# Altium PCB PCB1.PcbDoc
Units mm, origin at the board's own origin, x right, y up, seen from the top; angles counter-clockwise.
Board outline 32.21 x 40 mm, 4 copper layers (Top Layer, Mid-Layer 1, Mid-Layer 2, Bottom Layer); 94 components, 53 nets, 416 pads, 127 vias.
Unrouted connection lines stored in the file: 127.
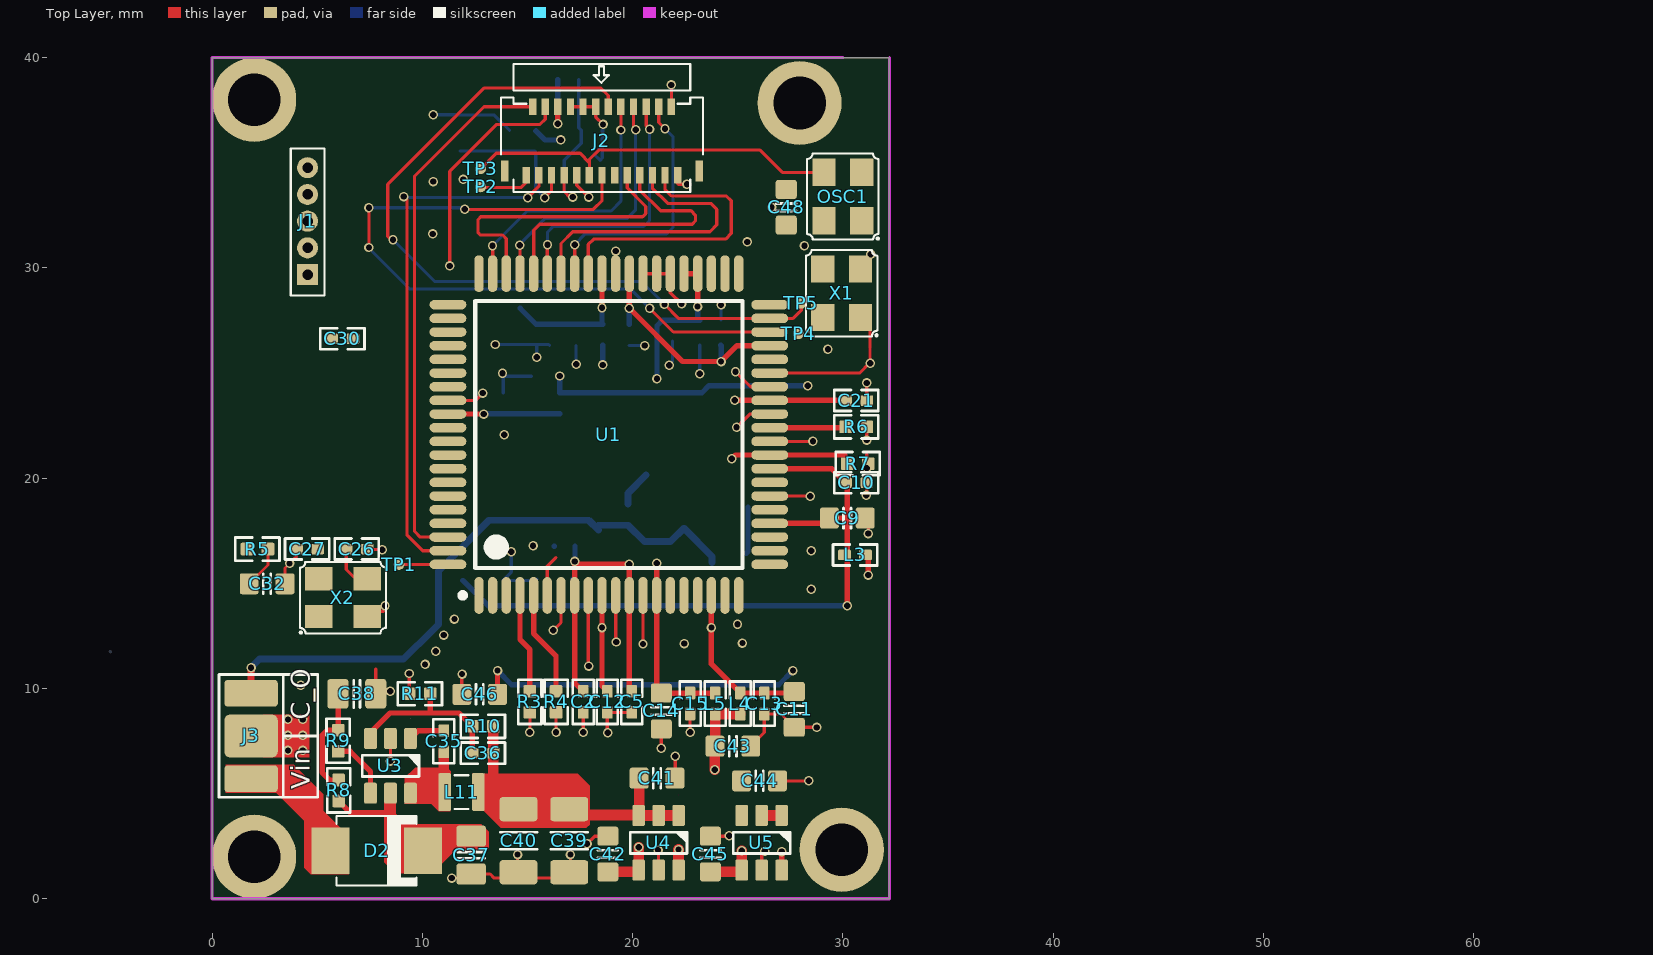
[diagram p0: Top Layer view]
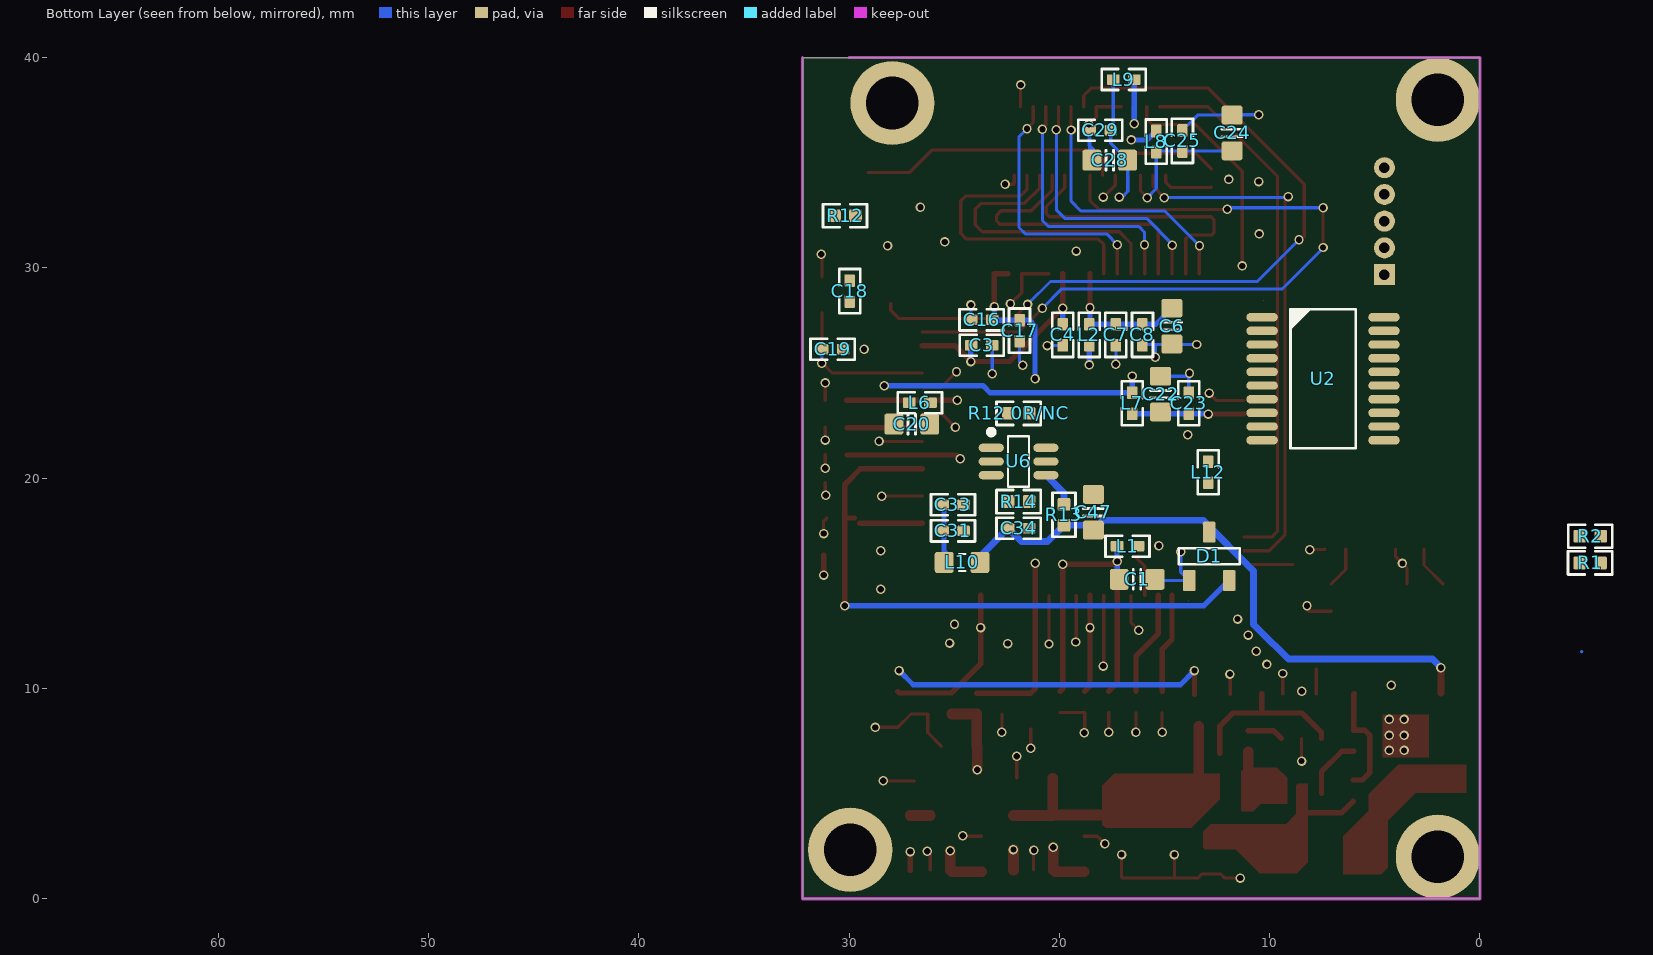
[diagram p1: Bottom Layer view, seen from below]
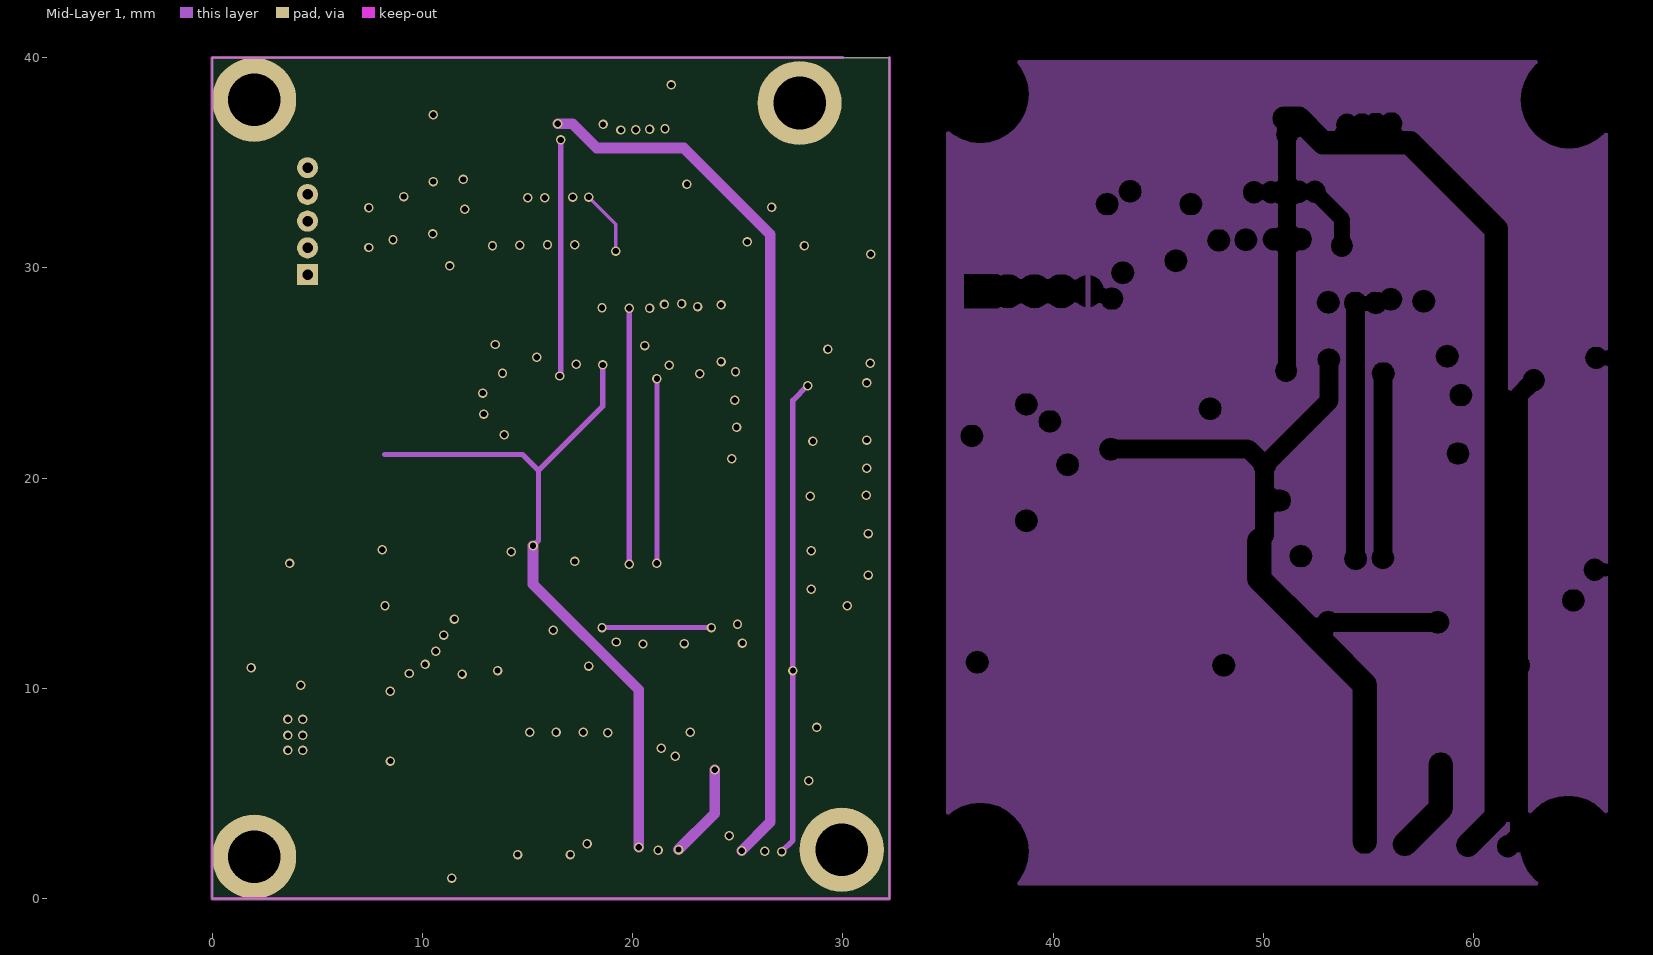
[diagram p2: Mid-Layer 1]
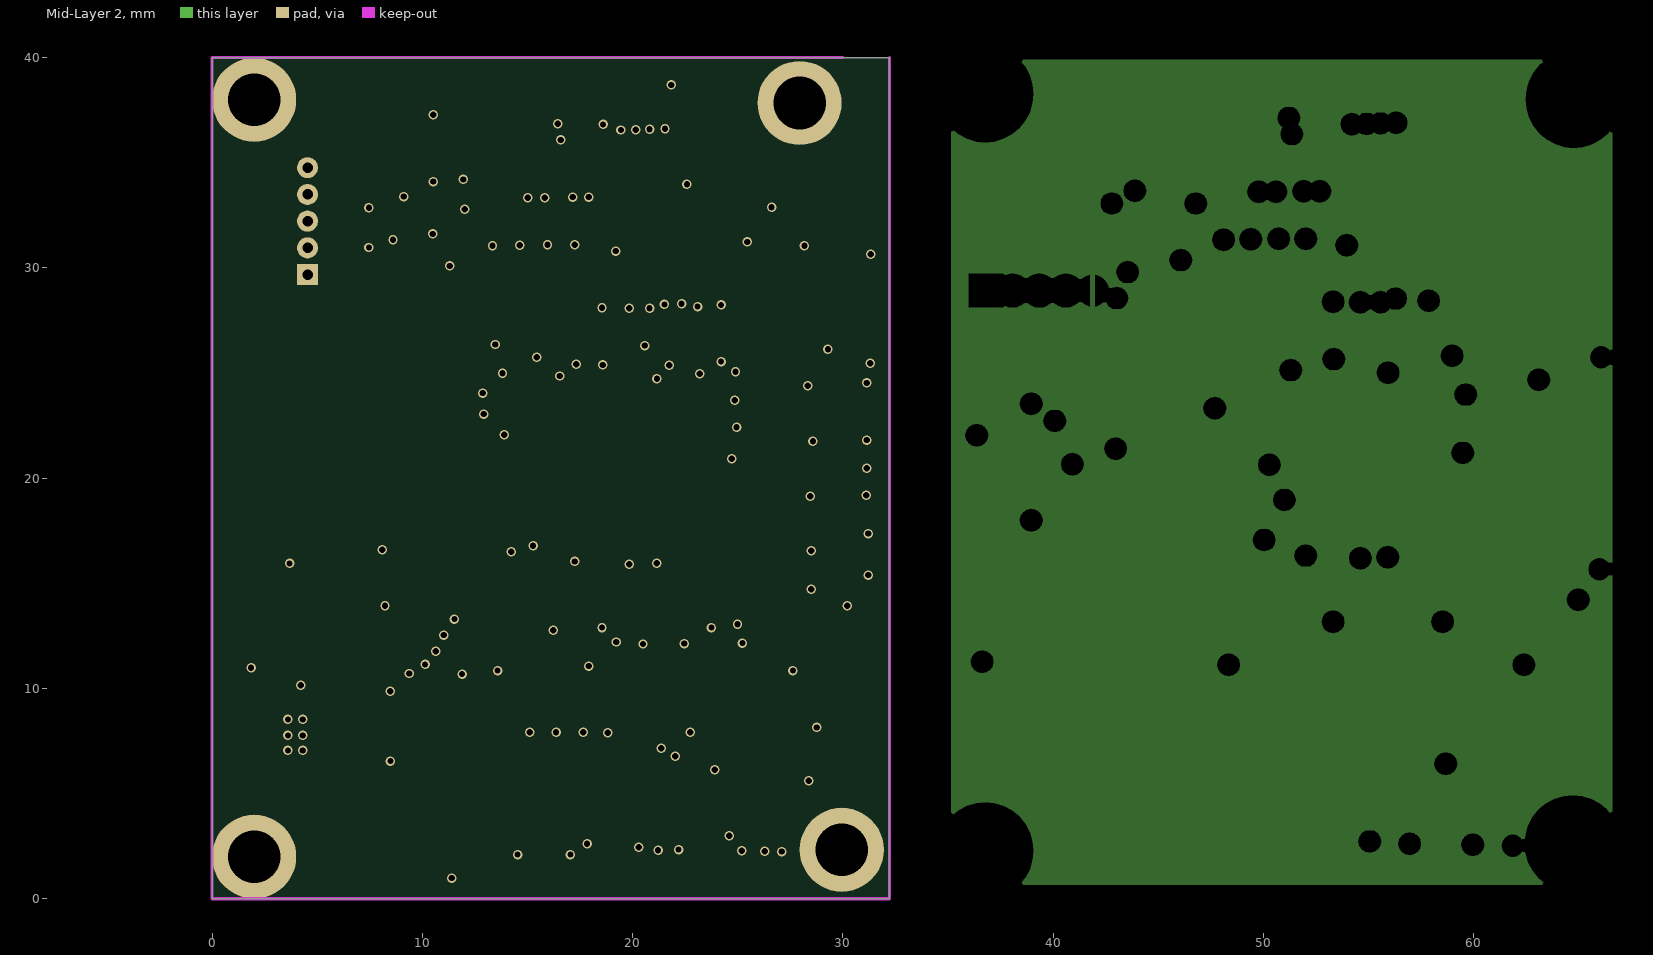
[diagram p3: Mid-Layer 2]
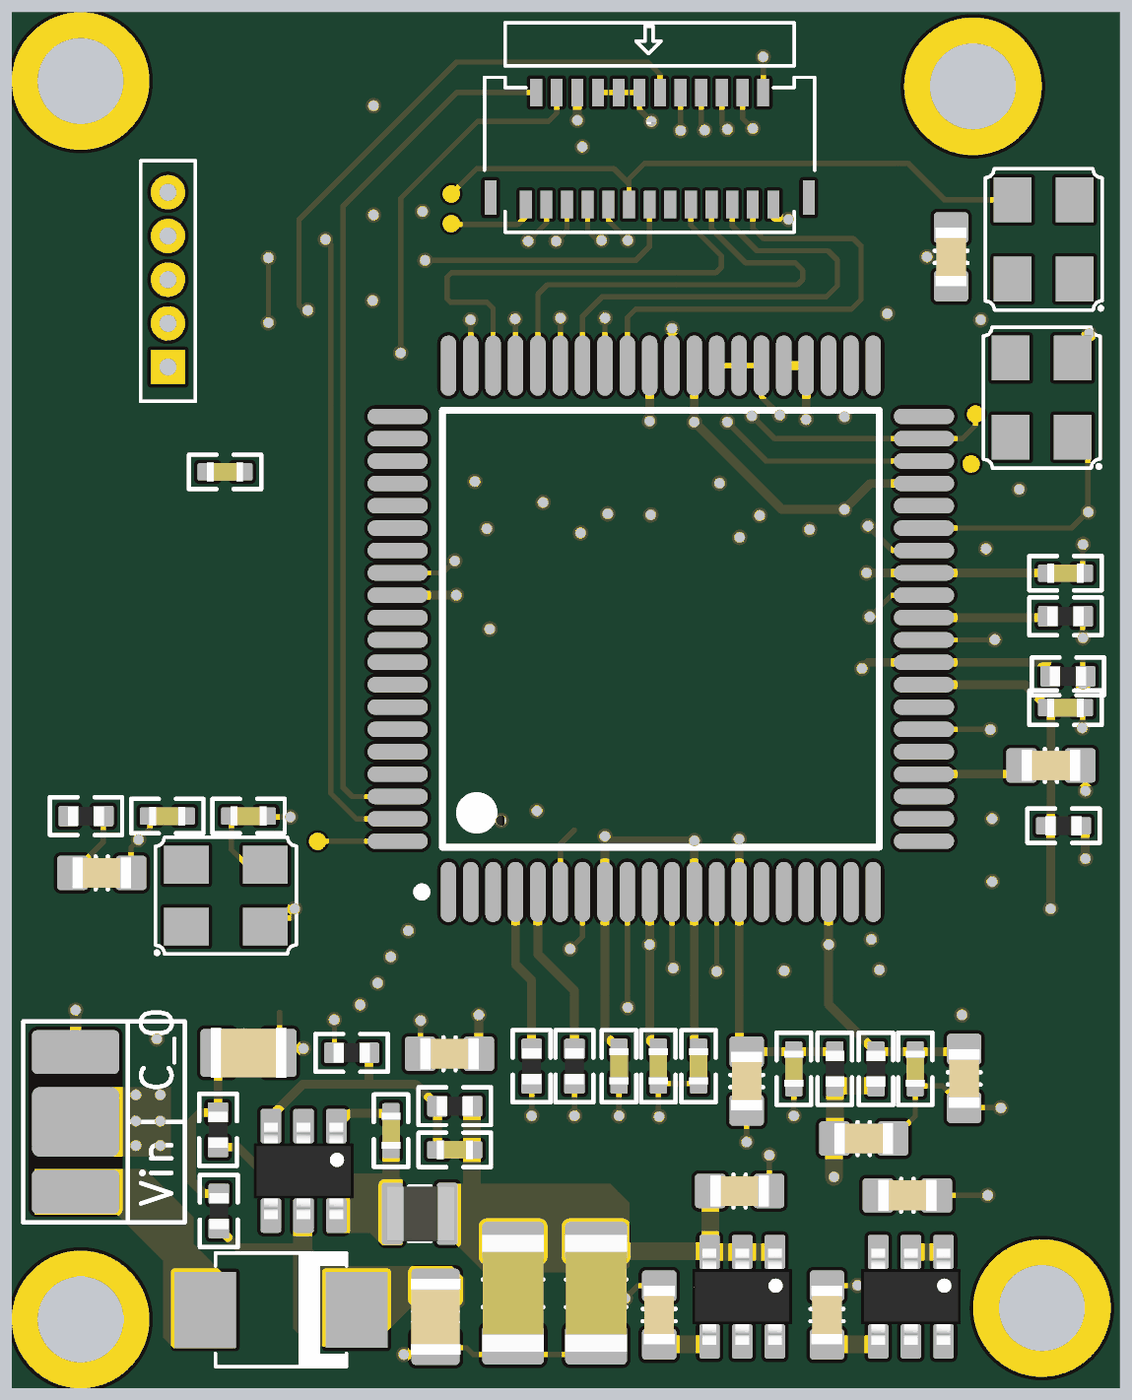
[diagram p4: 3D render of the assembled board from above, using the file's embedded part models]
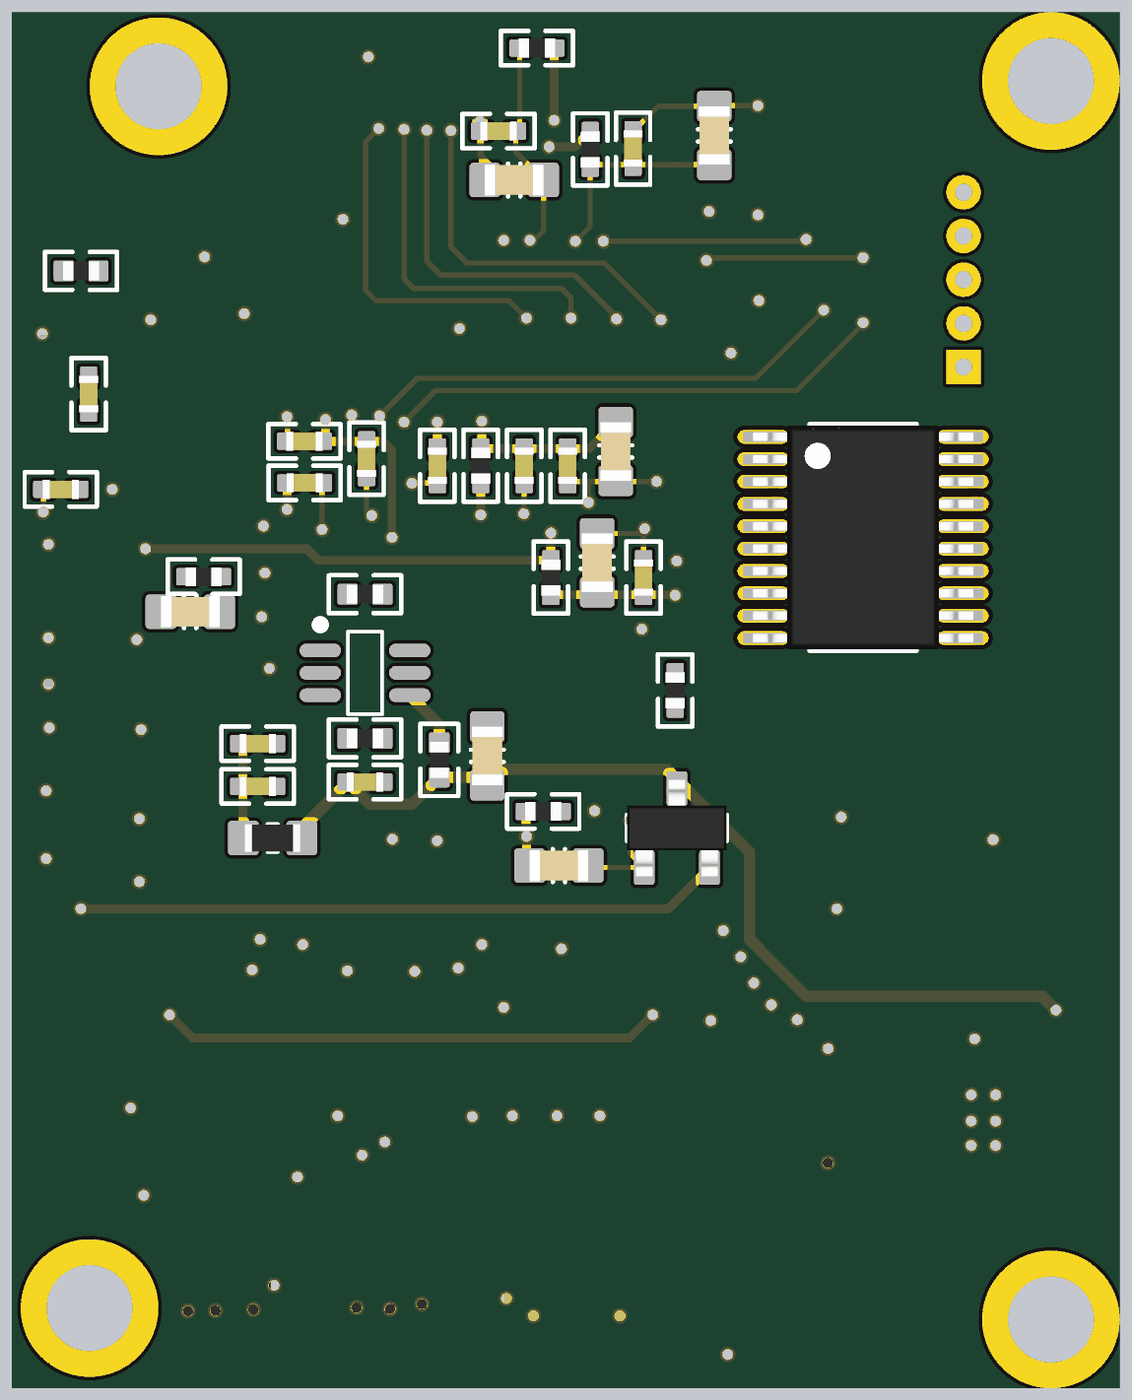
[diagram p5: 3D render of the assembled board from below, using the file's embedded part models]

## Layer stack, top to bottom
Top Solder: solder mask 0.0102, Solder Resist, Dk 3.5
Top Layer: signal copper 0.0356
Dielectric 1: dielectric 0.32, FR-4, Dk 4.8
Mid-Layer 1: signal copper 0.0356
Dielectric3: dielectric 0.32, FR-4, Dk 4.8
Mid-Layer 2: signal copper 0.0356
Dielectric2: dielectric 0.32, FR-4, Dk 4.8
Bottom Layer: signal copper 0.0356
Bottom Solder: solder mask 0.0102, Solder Resist, Dk 3.5

## Board outline
0,0 32.207,0 32.207,40 0,40

## Design rules (kind name [scope] priority, off if disabled: settings)
Clearance Clearance_Keepout [IsKeepOut] p1: gap=0.3
Clearance Clearance_Polygon [InPolygon] p2: gap=0.305
Clearance [All] p3: gap=0.152
HoleSize [All] p1: absolutevalues=TRUE maxlimit=3 minlimit=0.3 maxpercent=80.000 minpercent=20.000
PolygonConnect Vias [IsVia] p1: connectstyle=Direct reliefconductorwidth=0.254 reliefentries=4 polygonreliefangle="90 Angle" airgapwidth=0.254
PolygonConnect [All] p2: connectstyle=Relief reliefconductorwidth=0.254 reliefentries=4 polygonreliefangle="90 Angle" airgapwidth=0.254
RoutingVias [All] p1: holewidth=0.3 width=0.45 viastyle="Through Hole" minholewidth=0.3 minwidth=0.45 maxholewidth=1 maxwidth=3
SilkToSolderMaskClearance [IsPad] p1: minsilkscreentomaskgap=0.05 clearancetoexposedcopper=TRUE
SolderMaskExpansion [All] p1: expansion=0.102
Width [All] p1: maxlimit=2.54 minlimit=0.152 preferedwidth=0.152
28 further rules are at their usual default settings.

## Classes and differential pairs
net class Undefined: D0 D1 D2 D3 D4 D5 D6 D7
component class POWER: C35 C36 C37 C38 C39 C40 C41 C42 C43 C44 C45 C46 C48 D2 J3 L11 OSC1 R8 R9 R10 R11 U3 U4 U5
component class MAIN: C1 C2 C3 C4 C5 C6 C7 C8 C9 C10 C11 C12 C13 C14 C15 C16 C17 C18 C19 C20 C21 C22 C23 C24 C25 C26 C27 C28 C29 C30 C31 C32 C33 C34 C47 D1 J1 J2 L1 L2 L3 L4 L5 L6 L7 L8 L9 L10 L12 R1 R2 R3 R4 R5 R6 R7 R12 "R12 0R/NC" R13 R14 TP1 TP2 TP3 TP4 TP5 U1 U2 U6 X1 X2

## Components (designator, comment, footprint, x,y, rotation, side; value= is the part's Value field where it differs from the comment)
C1 "10uF" CAPC1608X90N 16.302,15.194 r180 bottom
C2 "0.1uF" CAPC1005X55N 17.653,9.362 r270 top
C3 "0.1uF" CAPC1005X55N 23.694,26.319 r180 bottom
C4 "0.1uF" CAPC1005X55N 19.837,26.817 r270 bottom
C5 "0.1uF" CAPC1005X55N 19.964,9.362 r270 top
C6 "10uF" CAPC1608X90N 14.651,27.234 r270 bottom
C7 "0.1uF" CAPC1005X55N 17.311,26.817 r270 bottom
C8 "0.1uF" CAPC1005X55N 16.048,26.817 r270 bottom
C9 "10uF" CAPC1608X90N 30.209,18.105 r0 top
C10 "0.1uF" CAPC1005X55N 30.632,19.782 r0 top
C11 "10uF" CAPC1608X90N 27.686,9.007 r270 top
C12 "0.1uF" CAPC1005X55N 18.796,9.362 r270 top
C13 "0.1uF" CAPC1005X55N 26.264,9.286 r270 top
C14 "10uF" CAPC1608X90N 21.361,8.931 r270 top
C15 "0.1uF" CAPC1005X55N 22.733,9.286 r270 top
C16 "0.1uF" CAPC1005X55N 23.698,27.529 r0 bottom
C17 "0.1uF" CAPC1005X55N 21.895,27.021 r270 bottom
C18 "18pF" CAPC1005X55N 29.972,28.9 r270 bottom
C19 "18pF" CAPC1005X55N 30.785,26.132 r180 bottom
C20 "10uF" CAPC1608X90N 27.019,22.574 r0 bottom
C21 "0.1uF" CAPC1005X55N 30.632,23.693 r0 top
C22 "10uF" CAPC1608X90N 15.189,23.998 r90 bottom
C23 "0.1uF" CAPC1005X55N 13.843,23.566 r90 bottom
C24 "10uF" CAPC1608X90N 11.786,36.419 r90 bottom
C25 "0.1uF" CAPC1005X55N 14.148,36.038 r90 bottom
C26 "18pF" CAPC1005X55N 6.883,16.632 r0 top
C27 "18pF" CAPC1005X55N 4.521,16.632 r180 top
C28 "10uF" CAPC1608X90N 17.602,35.123 r0 bottom
C29 "0.1uF" CAPC1005X55N 18.059,36.546 r0 bottom
C30 "0.1uF" CAPC1005X55N 6.199,26.638 r0 top
C31 "33pF" CAPC1005X55N 25.058,17.494 r180 bottom
C32 "10uF" CAPC1608X90N 2.616,14.981 r0 top
C33 "0.1uF" CAPC1005X55N 25.058,18.739 r180 bottom
C34 "270PF" CAPC1005X55N 21.939,17.621 r180 bottom
C35 "0.1uF" CAPC1005X55N 11.024,7.488 r270 top
C36 "10nF" CAPC1005X55N 12.878,6.929 r180 top
C37 "10uF/16V(2012)" CAPC2012X135N 12.319,2.078 r270 top
C38 "10uF/16V(2012)" CAPC2012X135N 6.883,9.749 r0 top
C39 "22uF/6.3V(3216)" CAPC3216X100N 16.986,2.762 r270 top
C40 "22uF/6.3V(3216)" CAPC3216X100N 14.573,2.762 r270 top
C41 "1uF/6.3V" CAPC1608X90N 21.158,5.735 r0 top
C42 "1uF/6.3V" CAPC1608X90N 18.821,2.129 r90 top
C43 "1uF/6.3V" CAPC1608X90N 24.765,7.259 r0 top
C44 "1uF/6.3V" CAPC1608X90N 26.035,5.608 r0 top
C45 "1uF/6.3V" CAPC1608X90N 23.698,2.129 r90 top
C46 "1uF/6.3V" CAPC1608X90N 12.725,9.723 r180 top
C47 "10uF" CAPC1608X90N 18.383,18.383 r90 bottom
C48 "1uF/6.3V" CAPC1608X90N 27.305,32.888 r90 top
D1 "BAT54SLT1" SOT23-3 12.873,16.286 r90 bottom
D2 "RB050LA-40" RB50LA-40 7.823,2.281 r270 top
J1 "1.27mm" "JP 1.27mm" 4.54,32.226 r90 top
J2 "00  6296 025 230 883" "FPC ASSY 0.3MM" 18.542,36.038 r0 top
J3 "pad_3point" Jump_3Way_Text1 1.854,7.742 r90 top
L1 "FB" INDC1005N 16.759,16.769 r0 bottom
L2 "FB" INDC1005N 18.574,26.817 r90 bottom
L3 "FB" INDC1005N 30.575,16.351 r180 top
L4 "FB" INDC1005N 25.121,9.286 r90 top
L5 "FB" INDC1005N 23.927,9.286 r90 top
L6 "FB" INDC1005N 26.63,23.59 r180 bottom
L7 "FB" INDC1005N 16.535,23.566 r270 bottom
L8 "FB" INDC1005N 15.392,36.012 r270 bottom
L9 "FB" INDC1005N 16.942,38.959 r0 bottom
L10 "FB" INDC1608N 24.626,15.995 r180 bottom
L11 "NRS2012T 4R7M GJ" INDC2016X180N 11.862,5.075 r0 top
L12 "FB" INDC1005N 12.922,20.288 r90 bottom
OSC1 "27Mhz" XTAL-4pin-3225 29.997,33.396 r90 top
R1 "4.7K" RESC1005X40N -5.239,15.97 r0 bottom
R2 "4.7K" RESC1005X40N -5.247,17.24 r0 bottom
R3 "10K" RESC1005X40N 15.113,9.362 r90 top
R4 "10K" RESC1005X40N 16.358,9.362 r90 top
R5 "10K" RESC1005X40N 2.159,16.632 r180 top
R6 "1.2K,1%" RESC1005X40N 30.632,22.439 r0 top
R7 "75" RESC1005X40N 30.702,20.694 r0 top
R8 "10K" RESC1005X40N 6.02,5.151 r90 top
R9 "100K" RESC1005X40N 5.994,7.513 r270 top
R10 "30.9K,1%" RESC1005X40N 12.878,8.199 r180 top
R11 "5.76K,1%" RESC1005X40N 9.881,9.749 r180 top
R12 "0R" RESC1005X40N 30.194,32.48 r0 bottom
"R12 0R/NC" "0R" RESC1005X40N 21.939,23.082 r0 bottom
R13 "75R2" RESC1005X40N 19.78,18.264 r90 bottom
R14 "0R" RESC1005X40N 21.939,18.891 r180 bottom
TP1 "TEST POINT" TP-R20 8.89,15.895 r270 top
TP2 "TEST POINT" TP-R20 12.776,33.853 r270 top
TP3 "TEST POINT" TP-R20 12.776,34.717 r270 top
TP4 "TEST POINT" TP-R20 27.889,26.868 r90 top
TP5 "TEST POINT" TP-R20 28.016,28.316 r90 top
U1 "CH7025/CH7026_LQFP80" TQFP80_N 18.868,22.077 r90 top
U2 "MINI51FDE" TSSOP65P640X120-20N 7.461,24.733 r180 bottom
U3 "FR9801" SOT23-6 8.484,6.32 r270 top
U4 "FP6121-IS9GTR/TSOT23-6L" SOT23-6 21.234,2.662 r270 top
U5 "FP6121-IS9GTR/TSOT23-6L" SOT23-6 26.137,2.662 r270 top
U6 "OPA361/SC70" SC07 21.939,20.796 r180 bottom
X1 "Crystal (14.318 MHz)" XTAL-4pin-3225 29.94,28.797 r90 top
X2 "Crystal (12MHz)" XTAL-4pin-3225 6.223,14.321 r0 top

## Footprints (in the part's own frame and the unit in brackets; to place one, negate y for a bottom-side part, rotate by r counter-clockwise, add the part's x,y. Pads: shape width x height; smd on the part's side, far side on the other; paste and mask are expansions set on the pad)
CAPC1005X55N [mm] "Chip Capacitor, Body 1.0x0.5mm, EIA 0402, IPC Medium Density"
  round 0.2 on Mech15: 0(0,0)
  rrect20% 0.6x0.5 smd: 1(-0.5,0) 2(0.5,0)
  Top Layer pour cut-out: -0.325,0.375 -0.2,0.5 0.2,0.5 0.325,0.375 0.325,-0.375 0.2,-0.5 -0.2,-0.5 -0.325,-0.375
  silkscreen extent -1.05,-0.5 1.05,0.5, body extent -0.52,-0.27 0.53,0.28, height 0.55
CAPC1608X90N [mm] "Chip Capacitor, Body 1.6x0.8mm, EIA 0603, IPC Medium Density"
  round 0.254 on Mech15: 0(0,0)
  rrect25% 0.9x1 smd: 1(-0.85,0) 2(0.85,0)
  Top Layer pour cut-out: -0.6,0.5 -0.4,0.7 0.4,0.7 0.6,0.5 0.6,-0.5 0.4,-0.7 -0.4,-0.7 -0.6,-0.5
  silkscreen extent -0.18,-0.48 0.18,0.48, body extent -0.85,-0.45 0.85,0.45, height 0.89
CAPC2012X135N [mm] "Chip Capacitor, Body 2.0x1.2mm, EIA 0805, IPC Medium Density"
  round 0.254 on Mech15: 0(0,0)
  rrect25% 1x1.4 smd: 1(-0.9,0) 2(0.9,0)
  Top Layer pour cut-out: -0.675,0.7 -0.475,0.9 0.475,0.9 0.675,0.7 0.675,-0.7 0.475,-0.9 -0.475,-0.9 -0.675,-0.7
  silkscreen extent -0.15,-0.65 0.15,0.65, body extent -1.1,-0.72 1.1,0.73, height 1.34
CAPC3216X100N [mm] "Chip Capacitor, Body 3.2x1.6mm, 1.0mm H, EIA 1206, IPC Medium Density"
  round 0.508 on Mech15: 0(0,0)
  rrect25% 1.15x1.8 smd: 1(-1.5,0) 2(1.5,0)
  silkscreen extent -0.4,-0.88 0.4,0.88, body extent -1.7,-0.9 1.7,0.9, height 1
"FPC ASSY 0.3MM" [mm]
  rect 0.35x0.8 smd: 1(-3.6,-1.63) 2(-3.3,1.63) 3(-3,-1.63) 4(-2.7,1.63) 5(-2.4,-1.63) 6(-2.1,1.63) 7(-1.8,-1.63) 8(-1.5,1.63) 9(-1.2,-1.63) 10(-0.9,1.63) 11(-0.6,-1.63) 12(-0.3,1.63) 13(0,-1.63) 14(0.3,1.63) 15(0.6,-1.63) 16(0.9,1.63) 17(1.2,-1.63) 18(1.5,1.63) 19(1.8,-1.63) 20(2.1,1.63) 21(2.4,-1.63) 22(2.7,1.63) 23(3,-1.63) 24(3.3,1.63) 25(3.6,-1.63)
  rect 0.35x1 smd: ""(-4.625,-1.43) ""(4.625,-1.43)
  silkscreen extent -4.8,-2.43 4.8,3.66
INDC1005N [mm] "Chip Inductor, Body 1.0x0.5mm, EIA 0402, IPC Medium Density"
  round 0.2 on Mech15: 0(0,0)
  rrect20% 0.6x0.5 smd: 1(-0.5,0) 2(0.5,0)
  Top Layer pour cut-out: -0.325,0.375 -0.2,0.5 0.2,0.5 0.325,0.375 0.325,-0.375 0.2,-0.5 -0.2,-0.5 -0.325,-0.375
  silkscreen extent -1.05,-0.5 1.05,0.5, body extent -0.52,-0.27 0.53,0.28, height 0.4
INDC1608N [mm] "Chip bead, Body 1.6x0.8mm, 0603, IPC Medium Density"
  round 0.254 on Mech15: 0(0,0)
  rrect25% 0.9x1 smd: 1(-0.85,0) 2(0.85,0)
  Top Layer pour cut-out: -0.4,0.6 0.4,0.6 0.4,-0.6 -0.4,-0.6
  silkscreen extent -0.15,-0.41 0.15,0.41, body extent -0.8,-0.4 0.8,0.4, height 0.79
INDC2016X180N [mm] "Chip Inductor, 2-Leads, Body 2.0x1.6mm, IPC 0806 Medium Density"
  round 0.254 on Mech15: 0(0,0)
  rrect25% 0.6x1.8 smd: 1(-0.8,0) 2(0.8,0)
  Top Layer pour cut-out: -0.5,0.875 0.5,0.875 0.5,-0.875 -0.5,-0.875
  silkscreen extent -0.33,-0.8 0.33,0.8, body extent -0.97,-0.8 1.03,0.8, height 0.99
"JP 1.27mm" [mm]
  rect 1x1 hole 0.5: 1(-2.54,0)
  round 1 hole 0.5: 2(-1.27,0) 3(0,0) 4(1.27,0) 5(2.54,0)
  silkscreen extent -3.54,-0.8 3.46,0.8
Jump_3Way_Text1 [mil] "SMT jumper for fixed or variable"
  rrect25% 50x100 smd: 1(-80,0) 3(80,0)
  rrect25% 80x100 smd: 2(0,0)
  rrect25% 218x108 on Top Solder: SM(0,0)
  silkscreen extent -115,-125 115,60
RB50LA-40 [mm]
  rect 2.2x1.8 smd: 1(0,-2.2) 2(0,2.2)
  silkscreen extent -1.65,-1.91 1.65,1.91
RESC1005X40N [mm] "Chip Resistor, Body 1.0x0.5mm, EIA 0402, IPC Medium Density"
  round 0.2 on Mech15: 0(0,0)
  rrect20% 0.6x0.6 smd: 1(-0.5,0) 2(0.5,0)
  Top Layer pour cut-out: -0.325,0.375 -0.2,0.5 0.2,0.5 0.325,0.375 0.325,-0.375 0.2,-0.5 -0.2,-0.5 -0.325,-0.375
  silkscreen extent -1.05,-0.55 1.05,0.55, body extent -0.52,-0.27 0.53,0.28, height 0.4
SC07 [mm]
  oval 1.2x0.4 smd: 1(-1.3,0.65) 2(-1.3,0) 3(-1.3,-0.65) 4(1.3,-0.65) 5(1.3,0) 6(1.3,0.65)
  silkscreen extent -1.42,-1.2 0.5,1.52
SOT23-3 [mm] "SOT23, 3 pin"
  round 0.5 on Mech15: 0(0,0)
  rrect25% 1x0.6 smd: 1(-1.15,0.95) 2(-1.15,-0.95) 3(1.15,0)
  silkscreen extent -0.38,-1.45 0.38,1.45, body extent -1.4,-1.45 1.4,1.45, height 1.29
SOT23-6 [mm]
  round 0.5 on Mech15: 0(0,0)
  rrect25% 1x0.6 smd: 1(-1.3,0.95) 2(-1.3,0) 3(-1.3,-0.95) 4(1.3,-0.95) 5(1.3,0) 6(1.3,0.95)
  silkscreen extent -0.51,-1.35 0.51,1.35, body extent -1.4,-1.45 1.4,1.45, height 1.44
TP-R20 [mil]
  round 20 smd paste-30 mask+3: 1(0,0)
  body extent -11,-11 11,11
TQFP80_N [mm] "80-Pin Thin Plastic Quad Flat Pack 0.65 mm Pitch, IPC Medium Density"
  oval 1.75x0.45 smd: 1(-7.65,6.175) 2(-7.65,5.525) 3(-7.65,4.875) 4(-7.65,4.225) 5(-7.65,3.575) 6(-7.65,2.925) 7(-7.65,2.275) 8(-7.65,1.625) 9(-7.65,0.975) 10(-7.65,0.325) 11(-7.65,-0.325) 12(-7.65,-0.975) 13(-7.65,-1.625) 14(-7.65,-2.275) 15(-7.65,-2.925) 16(-7.65,-3.575) 17(-7.65,-4.225) 18(-7.65,-4.875) 19(-7.65,-5.525) 20(-7.65,-6.175) 41(7.65,-6.175) 42(7.65,-5.525) 43(7.65,-4.875) 44(7.65,-4.225) 45(7.65,-3.575) 46(7.65,-2.925) 47(7.65,-2.275) 48(7.65,-1.625) 49(7.65,-0.975) 50(7.65,-0.325) 51(7.65,0.325) 52(7.65,0.975) 53(7.65,1.625) 54(7.65,2.275) 55(7.65,2.925) 56(7.65,3.575) 57(7.65,4.225) 58(7.65,4.875) 59(7.65,5.525) 60(7.65,6.175)
  oval 0.45x1.75 smd: 21(-6.175,-7.65) 22(-5.525,-7.65) 23(-4.875,-7.65) 24(-4.225,-7.65) 25(-3.575,-7.65) 26(-2.925,-7.65) 27(-2.275,-7.65) 28(-1.625,-7.65) 29(-0.975,-7.65) 30(-0.325,-7.65) 31(0.325,-7.65) 32(0.975,-7.65) 33(1.625,-7.65) 34(2.275,-7.65) 35(2.925,-7.65) 36(3.575,-7.65) 37(4.225,-7.65) 38(4.875,-7.65) 39(5.525,-7.65) 40(6.175,-7.65) 61(6.175,7.65) 62(5.525,7.65) 63(4.875,7.65) 64(4.225,7.65) 65(3.575,7.65) 66(2.925,7.65) 67(2.275,7.65) 68(1.625,7.65) 69(0.975,7.65) 70(0.325,7.65) 71(-0.325,7.65) 72(-0.975,7.65) 73(-1.625,7.65) 74(-2.275,7.65) 75(-2.925,7.65) 76(-3.575,7.65) 77(-4.225,7.65) 78(-4.875,7.65) 79(-5.525,7.65) 80(-6.175,7.65)
  silkscreen extent -7.77,-6.35 6.35,7.07, body extent -7,-7 7,7, height 1.6
TSSOP65P640X120-20N [mm] "TSSOP, 20-Leads, Body 6.6x4.5mm (max), Pitch 0.65mm, IPC Medium Density"
  round 0.508 on Mech15 mask+0.127: 0(0,0)
  oval 1.5x0.4 smd paste-1 mask+0.127: 1(-2.9,2.925) 2(-2.9,2.275) 3(-2.9,1.625) 4(-2.9,0.975) 5(-2.9,0.325) 6(-2.9,-0.325) 7(-2.9,-0.975) 8(-2.9,-1.625) 9(-2.9,-2.275) 10(-2.9,-2.925) 11(2.9,-2.925) 12(2.9,-2.275) 13(2.9,-1.625) 14(2.9,-0.975) 15(2.9,-0.325) 16(2.9,0.325) 17(2.9,0.975) 18(2.9,1.625) 19(2.9,2.275) 20(2.9,2.925)
  silkscreen extent -1.55,-3.3 1.55,3.3, body extent -3.2,-3.25 3.2,3.25, height 1.2
XTAL-4pin-3225 [mm] "3.2 x 2.5 x 0.8 mm ceramic  crystal"
  rect 1.3x1.1 smd: 1(-1.15,-0.9) 2(1.15,-0.9) 3(1.15,0.9) 4(-1.15,0.9)
  silkscreen extent -2.05,-1.71 2.05,1.7, body extent -1.6,-1.25 1.6,1.25, height 0.8

## Part data
C1 C6 C9 C11 C14 C20 C22 C24 C28 C32 C47: library part PCAP_0, "CAP - 10uF 16V TE Tant"
C2 C3 C4 C5 C7 C8 C10 C12 C13 C15 C16 C17 C21 C23 C25 C29: library part C_0
C18 C19 C26 C27 C31 C33 C34: library part CAP
C30: library part "CAP NP_3"
C35: library part "CAP NP_16"
C36: library part "CAP NP_13"
C37: library part "CAP NP_17"
C38: library part "CAP NP_18"
C39: library part "CAP NP_15"
C40: library part "CAP NP_14"
C41 C44 C48: library part "CAP NP_0"
C42 C43 C45 C46: library part "CAP NP_1"
D1: library part "DIODE DUAL SERIES SOT23"
D2: library part "DIODE PIN_1"
J1: library part CON5_Dup1
J2: library part CON25
J3: library part CON3
L1 L2 L3 L4 L5 L6 L7 L8 L9 L10 L12: library part INDUCTOR
L11: library part INDUCTOR_0
OSC1: library part XO_50Mhz_3V3_50ppm_SMD, "OSC XO 50.000MHZ CMOS SMD"
R1 R2 R7: library part RESISTOR
R3 R4: library part R
R5 R12 "R12 0R/NC" R13 R14: library part 0R,1/10W,5%,0603_9, "0R,1/10W,5%,0603"
R6: library part R_4
R8 R9: library part 0R,1/10W,5%,0603_0, "0R,1/10W,5%,0603"
R10: library part 0R,1/10W,5%,0603_10, "0R,1/10W,5%,0603"
R11: library part 0R,1/10W,5%,0603_11, "0R,1/10W,5%,0603"
TP1 TP4 TP5: library part "Test Point_0"
TP2: library part "Test Point_1"
TP3: library part "Test Point_2"
U1: library part CH7025_LQFP80_0
U2: library part "IC TvDecoder TI TVP5150 QFP32_2"
U3: library part R1244N001B_1
U4 U5 U6: library part "IC DC/DC RT8258 SOT26_0"
X1: library part 535-9118-1-ND_0
X2: library part 535-9118-1-ND_1

## Free pads (board coordinates)
  round 4 hole 2.5: ""(2,2) ""(2,38) ""(27.94,37.846) ""(29.947,2.332)

## Via types
v1: diameter 0.45, hole 0.3, Top Layer to Bottom Layer, tented both sides, 127 vias

## Nets (pads, with @x,y where several pads share a name; then routed paths per layer and width w, separated by ;. In a path a pad name is that pad's centre, name@x,y a point inside that pad or via, vN(x,y) a via of type N, cw(c..) or ccw(c..) an arc to the next point about the centre after c; other vN are vias at no path point)
AGND: C1.2 C2.2 C3.2 C4.2 C5.2 C6.2 C7.2 C8.2 C9.2 C10.2 C11.2 C12.2 C13.2 C14.2 C15.2 C16.2 C17.2 C18.2 C19.2 C20.2 C21.2 C22.2 C23.2 C24.2 C25.2 C26.2 C27.2 C28.2 C29.2 C30.2 C32.2 C33.2 C34.2 C37.2 C38.2 C39.2 C40.2 C41.2 C42.2 C43.2 C44.2 C45.2 C46.2 C47.2 C48.2 D1.1 J1.5 J2.8 J2.10 J2.12 J2.15 J2.24 J2.25 J3.2 OSC1.2 R3.1 R4.1 R6.2 R7.2 R11.2 R14.2 U1.7 U1.9 U1.11 U1.13 U1.19 U1.26 U1.30 U1.32 U1.34 U1.46 U1.47 U1.48 U1.68 U3.2 U4.5 U5.5 U6.2 X1.2 X1.4 X2.2 X2.4 | length 85.4
  Top Layer w0.152: C32.2 3.466,15.729 v1(3.683,15.946) 4.021,16.284 C27.2 ; X2.2@7.073,13.671 8.143,13.671 ; C26.2 7.41,16.605 v1(8.096,16.605) ; C38.2 7.783,10.931 ; v1(8.484,6.548) U3.2 ; R11.2 v1@9.381,10.706 ; U1.68 12.531,23.702 v1(12.878,24.049) ; v1(11.398,0.984) 12.125,0.984 C37.2 13.219,1.178 13.413,0.984 C39.2@17.018,0.984 ; C46.2 v1@11.875,10.677 ; C40.2@14.529,1.035 v1(14.529,2.103) ; v1(15.113,7.92) R3.1 ; v1(16.231,12.771) 16.593,13.133 U1.7 ; v1(16.358,7.92) R4.1 ; J2.8 J2.10 J2.12 18.242,37.176 v1(18.593,36.825) ; C39.2@17.043,1.01 v1(17.043,2.103) ; v1(17.653,7.92) C2.2 ; v1(17.831,2.611) 18.198,2.979 C42.2 ; U1.9 17.893,11.084 v1(17.907,11.069) ; v1@18.796,7.92 C12.2 C5.2 ; v1@19.193,12.248 U1.11 ; v1(20.493,12.116) U1.13 ; U1.48 U1.47 U1.46 21.793,28.825 v1(22.327,28.291) ; v1(21.209,2.306) 21.234,2.281 U4.5 ; v1(21.361,7.158) C14.2 ; J2.24 v1(21.842,38.703) ; C41.2@22.022,5.749 v1(22.022,6.777) ; J2.25 22.142,34.012 22.174,33.98 v1(22.581,33.98) ; v1(22.733,7.92) C15.2 ; C45.2 24.574,2.979 v1(24.587,2.992) ; v1(24.892,25.065) 25.604,24.352 U1.34 ; v1(24.943,22.423) 25.572,23.052 U1.32 ; C43.2 26.264,7.908 C13.2 27.057,8.786 C11.2 v1@28.744,8.157 ; U5.5 26.137,2.103 v1(26.289,2.256) ; U1.26 28.442,19.152 v1(28.448,19.147) ; U1.30 28.565,21.752 v1(28.575,21.763) ; C44.2 v1(28.372,5.608) ; C9.2 31.21,17.954 v1(31.21,17.367) ; v1@31.132,19.215 C10.2 ; R7.2@31.132,20.475 31.132,21.135 ; R6.2 31.132,21.822 v1(31.14,21.814) ; C21.2 31.132,24.523 v1(31.14,24.531) ; X1.2@31.282,29.572 31.282,30.617 v1(31.318,30.653)
  Bottom Layer w0.152: -4.845,11.754 -4.827,11.736 ; v1(10.516,37.282) 11.772,37.282 C24.2 13.417,37.269 C25.2 ; v1(13.462,26.36) 16.005,26.36 C8.2 ; C23.2 13.843,24.963 13.958,24.848 C22.2 ; v1(14.224,16.505) 14.224,15.537 D1.1 15.394,15.136 C1.2 ; v1(15.443,25.751) 15.443,26.335 ; v1@17.311,25.432 C7.2 ; C29.2 18.559,35.813 ; v1(18.593,36.825) 18.593,35.846 18.559,35.813 ; C4.2 20.566,26.317 v1(20.574,26.309) ; v1(21.742,25.37) 21.895,25.522 C17.2 ; v1(23.19,24.963) 23.194,24.967 C3.2 ; C16.2 24.198,28.232 v1(24.206,28.24) ; 18.559,35.813 18.161,35.414 C28.2 18.559,35.23 18.559,35.813
  other v1: 3.607,7.056 4.318,7.056 3.607,7.767 4.318,7.767 18.821,7.894 28.753,8.148 3.607,8.529 4.318,8.529 8.477,9.874 4.216,10.155 11.887,10.688 9.373,10.714 10.128,11.144 10.636,11.779 22.454,12.136 25.222,12.162 19.228,12.212 11.017,12.541 24.987,13.049 11.525,13.303 8.223,13.938 28.499,14.727 28.499,16.556 31.115,19.197 31.14,20.467 13.894,22.068 13.811,24.987 17.323,25.42 29.286,26.132 28.169,31.059 25.451,31.237 10.49,31.618 26.605,32.888 10.516,34.107 11.938,34.209
AS: R4.2 U1.5 | length 5
  Top Layer w0.254: U1.5 15.293,12.617 16.358,11.552 R4.2
ATPG: R3.2 U1.4 | length 4.8
  Top Layer w0.254: U1.4 14.643,12.327 15.113,11.857 R3.2
AVDD: C1.1 C2.1 C3.1 C4.1 C5.1 L1.2 U1.8 U1.12 U1.37 U1.49 | length 40.1
  Top Layer w0.254: C2.1 17.243,10.273 U1.8 v1(17.243,16.044) 17.371,15.916 v1(19.843,15.916) U1.12 19.843,9.984 C5.1 ; U1.49 19.843,28.093 v1(19.837,28.087) 22.377,25.547 v1(24.206,25.547) 24.961,26.302 U1.37
  Mid-Layer 1 w0.254: v1(19.843,15.916) v1@19.843,28.082
  Mid-Layer 2 w0.254: v1(19.837,28.087) v1@19.843,28.082
  Bottom Layer w0.254: C1.1 17.243,15.284 v1(17.243,16.044) 17.259,16.061 L1.2 ; C4.1 v1(19.837,28.087) ; C3.1 24.206,26.307 v1(24.206,25.547)
AVDD2_8: C28.1 C29.1 J2.7 L9.2 | length 7.5
  Top Layer w0.152: J2.7 16.742,33.647 17.018,33.371 v1(17.145,33.371)
  Bottom Layer w0.152: v1(17.145,33.371) 17.018,33.371 16.752,33.636 C28.1 17.559,35.93 C29.1 17.442,36.663 L9.2
AVDD_DAC: C9.1 C10.1 D1.2 L3.2 U1.24 U1.28 | length 32
  Top Layer w0.254: U1.24 C9.1@29.504,17.852 ; U1.28 29.462,20.452 C10.1 30.209,19.705 30.209,18.105 ; C9.1@29.757,18.105 30.209,18.105 ; v1(30.201,13.94) L3.2@30.201,16.345 ; L3.2@30.209,16.353 30.209,18.105
  Bottom Layer w0.254: D1.2 13.12,13.94 v1(30.201,13.94)
AVDD_PLL: C20.1 C21.1 L6.2 U1.33 | length 5.3
  Top Layer w0.254: v1(24.85,23.702) U1.33 C21.1@30.123,23.702
CVBS_OUT: C31.2 C34.1 C47.1 D1.3 J3.3 L10.2 R13.1 | length 29.2
  Top Layer w0.33: J3.3 v1(1.854,10.993)
  Bottom Layer w0.33: v1(1.854,10.993) 2.259,11.398 9.112,11.398 10.475,12.76 10.475,12.766 10.763,13.054 10.763,15.589 13.176,18.002 17.914,18.002 C47.1 ; C47.1@18.383,17.764 R13.1 20.558,16.986 21.804,16.986 C34.1 23.776,16.284 L10.2
D0: J2.23 U1.52 | length 14
  Top Layer w0.152: U1.52 17.893,31.121 18.145,31.374 24.419,31.374 24.689,31.643 24.689,33.193 24.46,33.421 21.844,33.421 21.542,33.723 J2.23
D1: J2.22 U1.53 | length 12.4
  Top Layer w0.152: U1.53 v1@17.243,31.11 ; J2.22 21.242,36.919 v1(21.539,36.622)
  Bottom Layer w0.152: v1(17.247,31.11) 17.755,31.618 21.615,31.618 21.92,31.923 21.92,36.241 v1(21.539,36.622)
D2: J2.21 U1.54 | length 14
  Top Layer w0.152: U1.54 16.593,31.165 17.154,31.726 23.679,31.726 24.003,32.05 24.003,32.786 23.72,33.069 21.663,33.069 20.942,33.79 J2.21
D3: J2.20 U1.55 | length 12.5
  Top Layer w0.152: U1.55 v1@15.943,31.11 ; J2.20 20.643,37.666 20.643,36.756 v1(20.803,36.596)
  Bottom Layer w0.152: v1(15.951,31.11) 15.951,31.694 16.231,31.974 20.523,31.974 20.803,32.253 v1(20.803,36.596)
D4: J2.19 U1.56 | length 14.1
  Top Layer w0.152: U1.56 15.293,31.798 15.573,32.078 22.835,32.078 22.987,32.231 22.987,32.507 22.777,32.717 21.33,32.717 20.342,33.704 J2.19
D5: J2.18 U1.57 | length 12.5
  Top Layer w0.152: U1.57 v1@14.643,31.085 ; J2.18 20.042,36.671 v1(20.142,36.571)
  Bottom Layer w0.152: v1(14.63,31.085) 14.63,31.135 15.853,32.358 19.739,32.358 20.142,32.761 v1(20.142,36.571)
D6: J2.17 U1.58 | length 14
  Top Layer w0.152: U1.58 13.993,31.392 13.818,31.567 12.751,31.567 12.649,31.669 12.649,32.304 12.776,32.431 20.472,32.431 20.625,32.583 20.625,32.923 19.742,33.806 J2.17
D7: J2.16 U1.59 | length 12.8
  Top Layer w0.152: U1.59 v1@13.343,31.059 ; v1(19.442,36.56) J2.16
  Bottom Layer w0.152: v1(13.335,31.059) 14.986,32.71 18.974,32.71 19.442,33.178 v1(19.442,36.56)
DAC0: "R12 0R/NC.2" C31.1 C33.1 L10.1 R7.1 U1.29 U6.1 | length 7.7
  Top Layer w0.254: v1(24.714,20.925) 24.892,21.102 U1.29 30.099,21.102
  Bottom Layer w0.254: L10.1@25.407,16.437 25.488,16.519 C33.1@25.488,18.618
DOVDD2_8: C45.1 C48.1 J2.6 L9.1 OSC1.4 U5.4 | length 47.4
  Top Layer w0.254: v1(16.442,36.859) J2.6
  Top Layer w0.508: C45.1 U5.4@25.103,1.279 ; U5.4 v1(25.187,2.291)
  Mid-Layer 1 w0.508: v1(16.442,36.859) 17.142,36.859 18.293,35.707 22.428,35.707 26.543,31.593 26.543,3.648 v1(25.187,2.291)
  Bottom Layer w0.254: v1(16.442,36.859) L9.1
DVDD: C22.1 C23.1 L7.2 U1.69 | length 5.3
  Top Layer w0.254: U1.69 v1(12.923,23.052)
  Bottom Layer w0.254: v1(12.923,23.052) 12.937,23.066 C23.1 L7.2
DVDD1_8: C24.1 C25.1 J2.5 L8.2 | length 7.2
  Top Layer w0.152: v1(15.824,33.345) 16.142,33.663 J2.5
  Bottom Layer w0.152: C24.1 15.336,35.569 L8.2 15.392,33.777 v1(15.824,33.345)
GCLK: J2.9 U1.50 | length 4.5
  Top Layer w0.152: J2.9 17.342,33.936 v1(17.907,33.371) ; v1(19.193,30.805) v1@19.193,30.907
  Mid-Layer 1 w0.152: v1(17.907,33.371) 19.193,32.085 v1(19.193,30.805)
H: J2.2 U1.78 | length 25.6
  Top Layer w0.152: U1.78 9.894,17.202 9.627,17.47 9.627,34.361 12.933,37.668 J2.2
ICE_CLK: J1.3 U2.14
ICE_DAT: J1.2 U2.15
ISET: R6.1 U1.31 | length 3.6
  Top Layer w0.254: U1.31 R6.1@30.095,22.402
MCLK: J2.11 OSC1.3 R12.1 TP3.1 | length 18.2
  Top Layer w0.152: TP3.1 13.513,35.453 17.501,35.453 17.942,35.012 ; J2.11 17.942,35.012 ; OSC1.3 27.12,34.546 26.06,35.606 18.39,35.606 17.942,35.158 17.942,35.012
NetC35_1: C35.1 U3.1 | length 1.7
  Top Layer w0.254: U3.1 9.802,7.988 C35.1
NetC35_2: C35.2 L11.1 U3.6 | length 1.9
  Top Layer w0.508: L11.1@11.024,5.113 C35.2
NetC36_2: C36.2 R10.2 R11.1 U3.3 | length 7.9
  Top Layer w0.254: U3.3 7.534,7.91 8.458,8.834 11.743,8.834 R10.2 C36.2 ; 10.381,8.868 R11.1
NetC37_1: C37.1 D2.2 R8.1 U3.5 | length 2.6
  Top Layer w0.254: R8.1 6.587,4.084 8.433,4.084
NetC38_1: C38.1 R8.2 R9.1 | length 5.3
  Top Layer w0.254: C38.1 5.994,9.738 R9.1 5.473,8.013 5.232,7.772 5.232,6.007 5.588,5.651 R8.2
NetL12_1: L12.1 U6.6
NetR9_2: R9.2 U3.4 | length 3
  Top Layer w0.254: R9.2 6.571,7.013 7.534,6.05 U3.4
NetR13_2: "R12 0R/NC.1" R13.2 U6.4 | length 1.7
  Bottom Layer w0.33: R13.2 19.78,19.287 U6.4
NetR14_1: R14.1 U6.3
NetTP1_1: TP1.1 U1.80 | length 2.3
  Top Layer w0.152: TP1.1@8.89,15.902 U1.80
PWDN: J2.1 TP2.1 | length 2.6
  Top Layer w0.152: TP2.1 12.776,33.831 14.71,33.831 14.942,34.063 J2.1
RESETB: C32.1 J1.4 J2.4 R5.1 U1.6 U2.5 | length 14.7
  Top Layer w0.152: C32.1@1.753,14.967 C32.1 2.659,15.874 R5.1 ; v1(11.303,30.094) 11.303,34.59 13.538,36.825 15.596,36.825 15.842,37.071 J2.4 ; U1.6 15.943,15.816 16.351,16.224
SPC: J2.14 R1.1 TP5.1 U1.39 U2.8 | length 37.2
  Top Layer w0.152: v1@8.509,31.337 8.35,31.496 8.35,33.974 12.929,38.552 18.491,38.552 18.842,38.201 J2.14 ; v1(21.514,28.265) 22.177,27.602 U1.39 27.633,27.602 28.016,27.986 TP5.1
  Bottom Layer w0.152: v1(8.604,31.337) 10.584,29.357 20.422,29.357 v1(21.514,28.265)
SPD: J2.13 R2.1 TP4.1 U1.38 U2.7 | length 35.2
  Top Layer w0.152: v1(7.461,30.973) v1(7.461,32.861) ; v1(12.014,32.786) 12.017,32.783 18.132,32.783 18.542,33.193 J2.13 ; v1(20.803,28.087) 21.938,26.952 U1.38
  Bottom Layer w0.152: v1(7.461,30.973) 7.419,30.973 9.39,29.002 19.888,29.002 v1(20.803,28.087) ; v1(7.461,32.861) 11.94,32.861 v1(12.014,32.786)
V: J2.3 U1.79 | length 25.6
  Top Layer w0.152: v1(9.119,33.396) 9.274,33.24 9.274,17.289 10.011,16.552 U1.79 ; v1(15.011,33.345) 15.542,33.876 J2.3
  Bottom Layer w0.152: v1(9.119,33.396) 9.169,33.345 v1(15.011,33.345)
V12V: D2.1 J3.1
VCC1_8: C46.1 L6.1 L7.1 L8.1 U5.6 | length 64.6
  Top Layer w0.254: C46.1 v1(13.575,10.853) ; U5.6 v1(27.087,2.245)
  Mid-Layer 1 w0.254: v1@16.586,24.912 v1(16.586,36.088) ; v1(27.087,2.245) 27.62,2.778 27.62,23.703 v1(28.321,24.404)
  Mid-Layer 2 w0.254: v1(16.535,24.862) v1@16.586,24.912
  Bottom Layer w0.254: v1(13.575,10.853) 14.248,10.18 26.949,10.18 v1(27.622,10.853) ; L8.1 15.4,36.52 15.832,36.088 v1(16.586,36.088) ; v1(16.535,24.862) L7.1 23.292,24.066 23.63,24.404 v1(28.321,24.404)
VCC2_5: C43.1 L4.1 L5.1 U4.6 | length 9.3
  Top Layer w0.508: U4.6 v1(22.184,2.342) ; v1(23.901,6.142) C43.1@23.901,7.246 ; C43.1@23.927,7.271 L5.1 L4.1
  Mid-Layer 1 w0.508: v1(22.184,2.342) 23.901,4.059 v1(23.901,6.142)
VCC5: C36.1 C39.1 C40.1 C41.1 C44.1 L11.2 R10.1 U4.1 U4.2 U4.3 U5.1 U5.2 U5.3 | length 10.5
  Top Layer w0.508: 13.378,5.499 C36.1 R10.1 ; C39.1@17.018,3.984 U4.3@20.262,3.984 ; C41.1 20.308,3.986 20.332,3.962 U4.2 U4.1 ; U5.2 U5.1
VDD: C30.1 C42.1 J1.1 L1.1 L2.1 L3.1 L12.2 R1.2 R2.2 R5.2 U2.20 U4.4 U6.5 | length 38.4
  Top Layer w0.254: v1(31.209,15.395) L3.1@31.209,16.353
  Top Layer w0.508: C42.1 U4.4@20.201,1.279 ; U4.4 v1(20.284,2.449)
  Mid-Layer 1 w0.254: 8.204,21.128 14.757,21.128 15.519,20.366 ; v1(15.265,16.784) 15.519,17.038 15.519,20.366 ; v1(18.574,25.388) 18.574,23.421 15.519,20.366
  Mid-Layer 1 w0.508: v1(15.265,16.784) 15.265,14.956 20.284,9.937 v1(20.284,2.449)
  Bottom Layer w0.254: L1.1 L1.1@16.276,16.769 ; v1(18.574,25.388) L2.1
VDD_MEM: C14.1 C15.1 C16.1 C17.1 L5.2 U1.14 U1.44 U1.45 | length 25.2
  Top Layer w0.254: v1(21.143,15.962) U1.14 21.143,9.999 C14.1 23.921,9.781 L5.2 ; U1.45 U1.44 23.093,28.168 v1(23.089,28.164)
  Mid-Layer 1 w0.254: v1@21.157,15.976 v1(21.157,24.735)
  Mid-Layer 2 w0.254: v1(21.143,15.962) v1@21.157,15.976
  Bottom Layer w0.254: v1(21.157,24.735) 21.157,27.253 21.425,27.521 C17.1 23.19,27.521 C16.1 23.093,27.634 v1@23.093,28.164
VDDIO: C6.1 C7.1 C8.1 L2.2 U1.51 | length 6.7
  Top Layer w0.254: v1(18.542,28.113) U1.51
  Bottom Layer w0.254: C6.1 15.417,27.317 C8.1 C7.1 L2.2 18.542,27.35 v1(18.542,28.113)
VDDQ: C11.1 C12.1 C13.1 L4.2 U1.10 U1.18 | length 17.7
  Top Layer w0.254: U1.10 v1(18.542,12.898) 18.543,10.116 C12.1 ; U1.18 23.743,11.164 L4.2 C13.1 27.615,9.786 C11.1
  Mid-Layer 1 w0.254: v1(18.542,12.898) v1(23.749,12.898)
XI: C19.1 R12.2 U1.35 X1.1 | length 8
  Top Layer w0.152: U1.35 30.799,25.002 v1@31.28,25.484 ; v1@31.282,25.486 X1.1@31.282,27.872
  Bottom Layer w0.152: C19.1 31.285,25.479 v1(31.293,25.471)
XO: C18.1 U1.36 X1.3
Y0: C26.1 U2.10 X2.3 | length 1.9
  Top Layer w0.152: C26.1 6.383,15.66 X2.3@7.073,14.971
Y1: C27.1 U2.9 X2.1
pads on no net: "R12 0R/NC.0" C1.0 C2.0 C3.0 C4.0 C5.0 C6.0 C7.0 C8.0 C9.0 C10.0 C11.0 C12.0 C13.0 C14.0 C15.0 C16.0 C17.0 C18.0 C19.0 C20.0 C21.0 C22.0 C23.0 C24.0 C25.0 C26.0 C27.0 C28.0 C29.0 C30.0 C31.0 C32.0 C33.0 C34.0 C35.0 C36.0 C37.0 C38.0 C39.0 C40.0 C41.0 C42.0 C43.0 C44.0 C45.0 C46.0 C47.0 C48.0 D1.0 J2. J3.SM L1.0 L2.0 L3.0 L4.0 L5.0 L6.0 L7.0 L8.0 L9.0 L10.0 L11.0 L12.0 OSC1.1 R1.0 R2.0 R3.0 R4.0 R5.0 R6.0 R7.0 R8.0 R9.0 R10.0 R11.0 R12.0 R13.0 R14.0 U1.1 U1.2 U1.3 U1.15 U1.16 U1.17 U1.20 U1.21 U1.22 U1.23 U1.25 U1.27 U1.40 U1.41 U1.42 U1.43 U1.60 U1.61 U1.62 U1.63 U1.64 U1.65 U1.66 U1.67 U1.70 U1.71 U1.72 U1.73 U1.74 U1.75 U1.76 U1.77 U2.0 U2.1 U2.2 U2.3 U2.4 U2.6 U2.11 U2.12 U2.13 U2.16 U2.17 U2.18 U2.19 U3.0 U4.0 U5.0

## Polygon pours and split planes (outlines as drawn)
AGND on Mid-Layer 2 "GND_POWER" (solid, remove dead copper, pour order 0): 34.765,40.279 34.765,0.279 66.972,0.279 66.972,40.279
AGND on Mid-Layer 1 "GND_POWER" (solid, pour order 4): 34.536,40.251 34.536,0.251 66.744,0.251 66.744,40.251
no net on Mechanical 1 (solid): 57.606,56.196 57.606,49.226 58.876,49.226 58.876,13.033 57.606,13.033 57.606,6.064 65.226,6.064 65.226,13.033 63.956,13.033 63.956,49.226 65.226,49.226 65.226,56.196 57.606,56.196

## Keep-outs
Keep-Out Layer:
  lines w0.15: 30,40 0,40 0,0 32.207,0 32.207,40

## Other copper
Top Layer:
  rectangle net AGND: 2.413,6.726 4.623,8.758
  region net V12V: 0.66,5.05 3.048,5.05 4.394,3.703 4.394,1.468 4.699,1.163 6.502,1.163 6.502,2.967 5.283,4.186 5.283,4.973 3.886,6.37 0.66,6.37
  region net VCC5: 12.362,5.95 12.362,4.727 13.716,3.373 17.805,3.373 17.958,3.526 17.958,5.38 17.399,5.939
  region net NetC35_2: 9.169,4.516 10.414,4.516 10.77,4.161 11.322,4.161 11.362,4.2 11.362,6.058 11.176,6.243 9.652,6.243 9.169,5.761
  region net NetC37_1: 8.179,5.481 8.179,1.748 8.712,1.214 10.465,1.214 11.608,2.357 13.081,2.357 13.157,2.433 13.157,3.195 12.802,3.551 9.22,3.551 8.738,4.034 8.738,5.405 8.661,5.481

## Silkscreen, mask and mechanical layers (free items; w line width, h text height)
Top Overlay:
  lines w0.102: 18.148,39.162 18.406,39.162 18.406,39.594
Mechanical 1:
  region: 47.446,6.066 77.926,6.066 77.926,13.036 47.446,13.036
  region: 47.446,16.47 77.926,16.47 77.926,19.955 47.446,19.955
  region: 47.446,42.307 77.926,42.307 77.926,45.792 47.446,45.792
  region: 47.446,49.226 77.926,49.226 77.926,56.196 47.446,56.196
  lines w0.025: 47.446,5.718 77.926,5.718 77.926,6.066 47.446,6.066 47.446,5.718 ; 47.446,13.036 77.926,13.036 77.926,16.47 47.446,16.47 47.446,13.036 ; 47.446,19.955 77.926,19.955 77.926,42.307 47.446,42.307 47.446,19.955 ; 47.446,45.792 77.926,45.792 77.926,49.226 47.446,49.226 47.446,45.792 ; 47.446,56.196 77.926,56.196 77.926,56.544 47.446,56.544 47.446,56.196
  text "1-4" at 61.416,59.371 h3.17 r90
  text "L1: Copper+Cu platting 0.042mm" at 80.613,53.308 h3
  text "*  DIELECTRIC - Prepreg - 0.2mm" at 80.613,46.577 h3
  text "L2: Copper 0.035mm" at 80.613,42.005 h3
  text "*  DIELECTRIC - Glass epoxy  - 1.1mm" at 80.613,29.94 h3
  text "L3: Copper 0.035mm" at 80.613,17.113 h3
  text "*  DIELECTRIC - Prepreg - 0.2mm" at 80.613,10.636 h3
  text "L4: Copper+Cu platting 0.042mm" at 80.613,5.81 h3
  text "___________________________" at 47.319,-3.073 h3.17
  text "DESIGN CROSS SECTION CHART" at 48.589,-3.073 h3.17
  text "TOTAL THICKNESS 1.65mm" at 51.129,-9.423 h3.17
Mechanical 15:
  lines w0.1: 12,32 12,37 25.171,37 25.171,32 12,32

## Text inside footprints (layer, text, board x,y; h text height)
J3: Top Overlay "Vin" at 4.648,5.202 h0.89 r90; Top Overlay "C_O" at 4.648,8.504 h0.89 r90